# Altium PCB MAGI'sUSBASP-MinUSB.PcbDoc
Units mil, origin at the board's own origin, x right, y up, seen from the top; angles counter-clockwise.
Board outline 6000 x 4000 mil, 2 copper layers (Top Layer, Bottom Layer); 21 components, 22 nets, 103 pads, 26 vias.
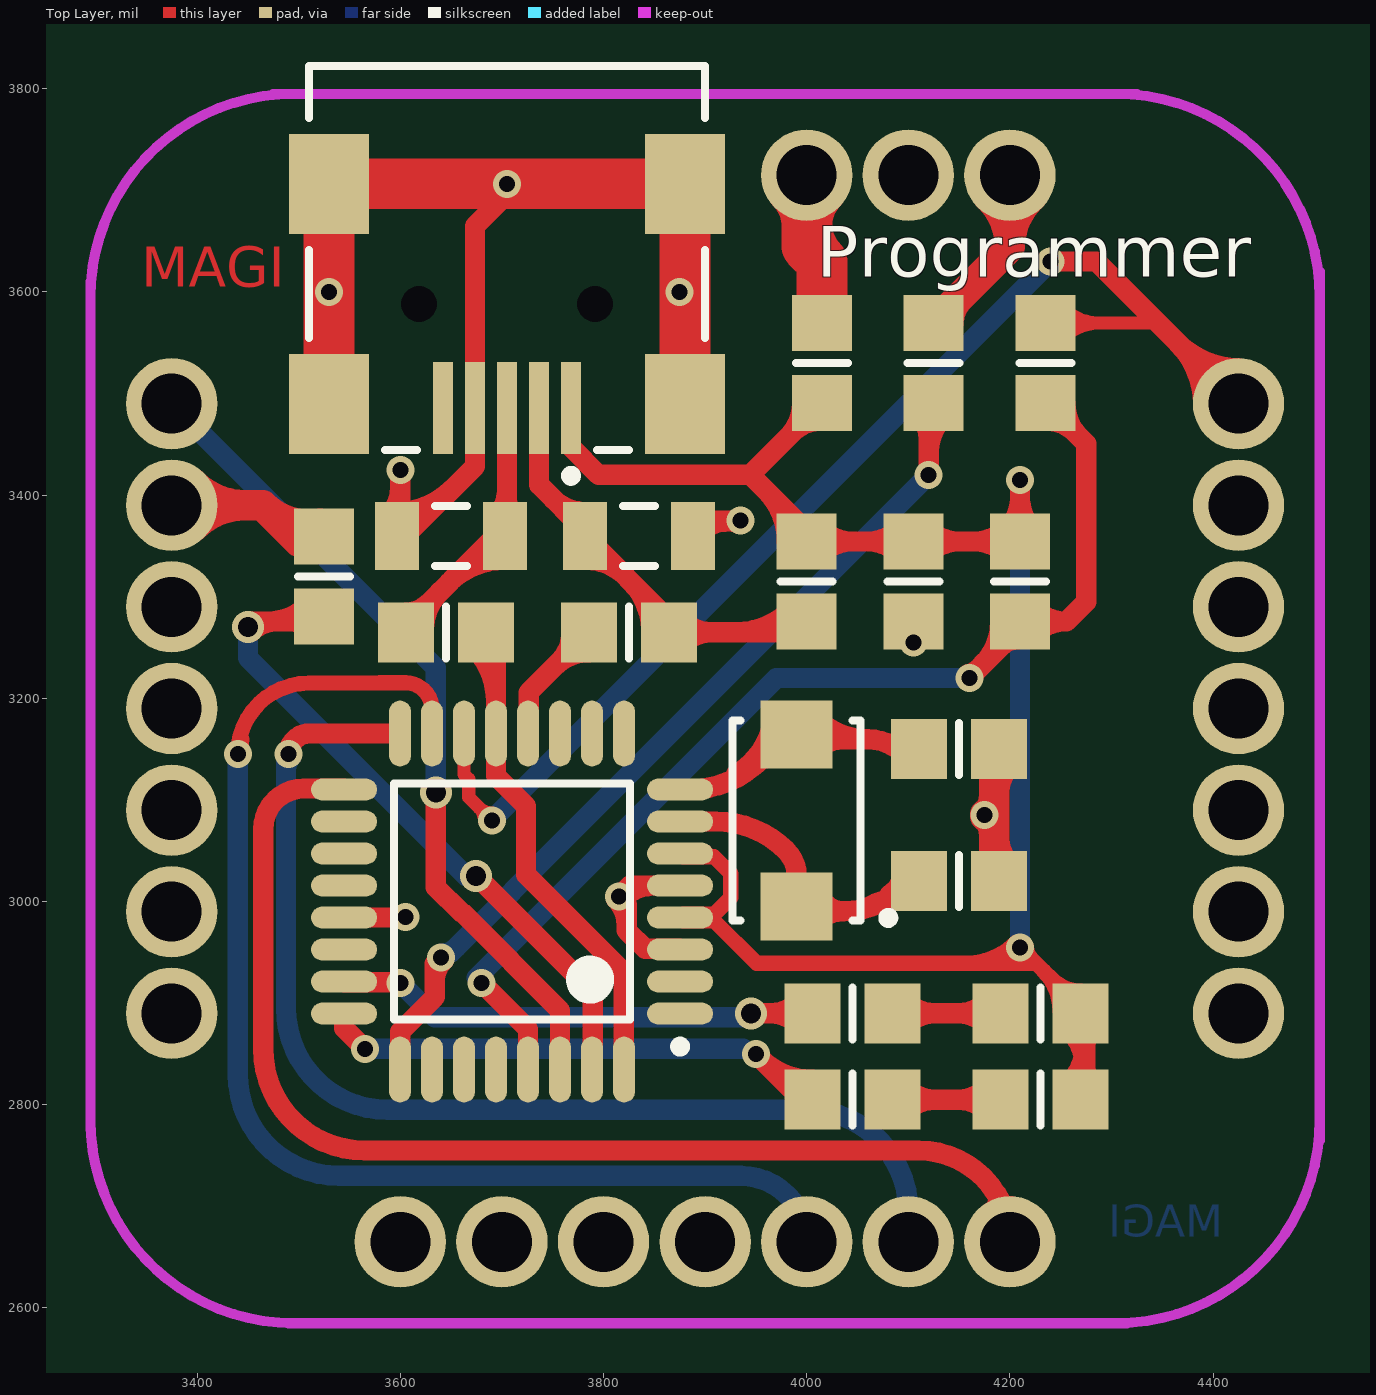
[diagram p0: Top Layer view]
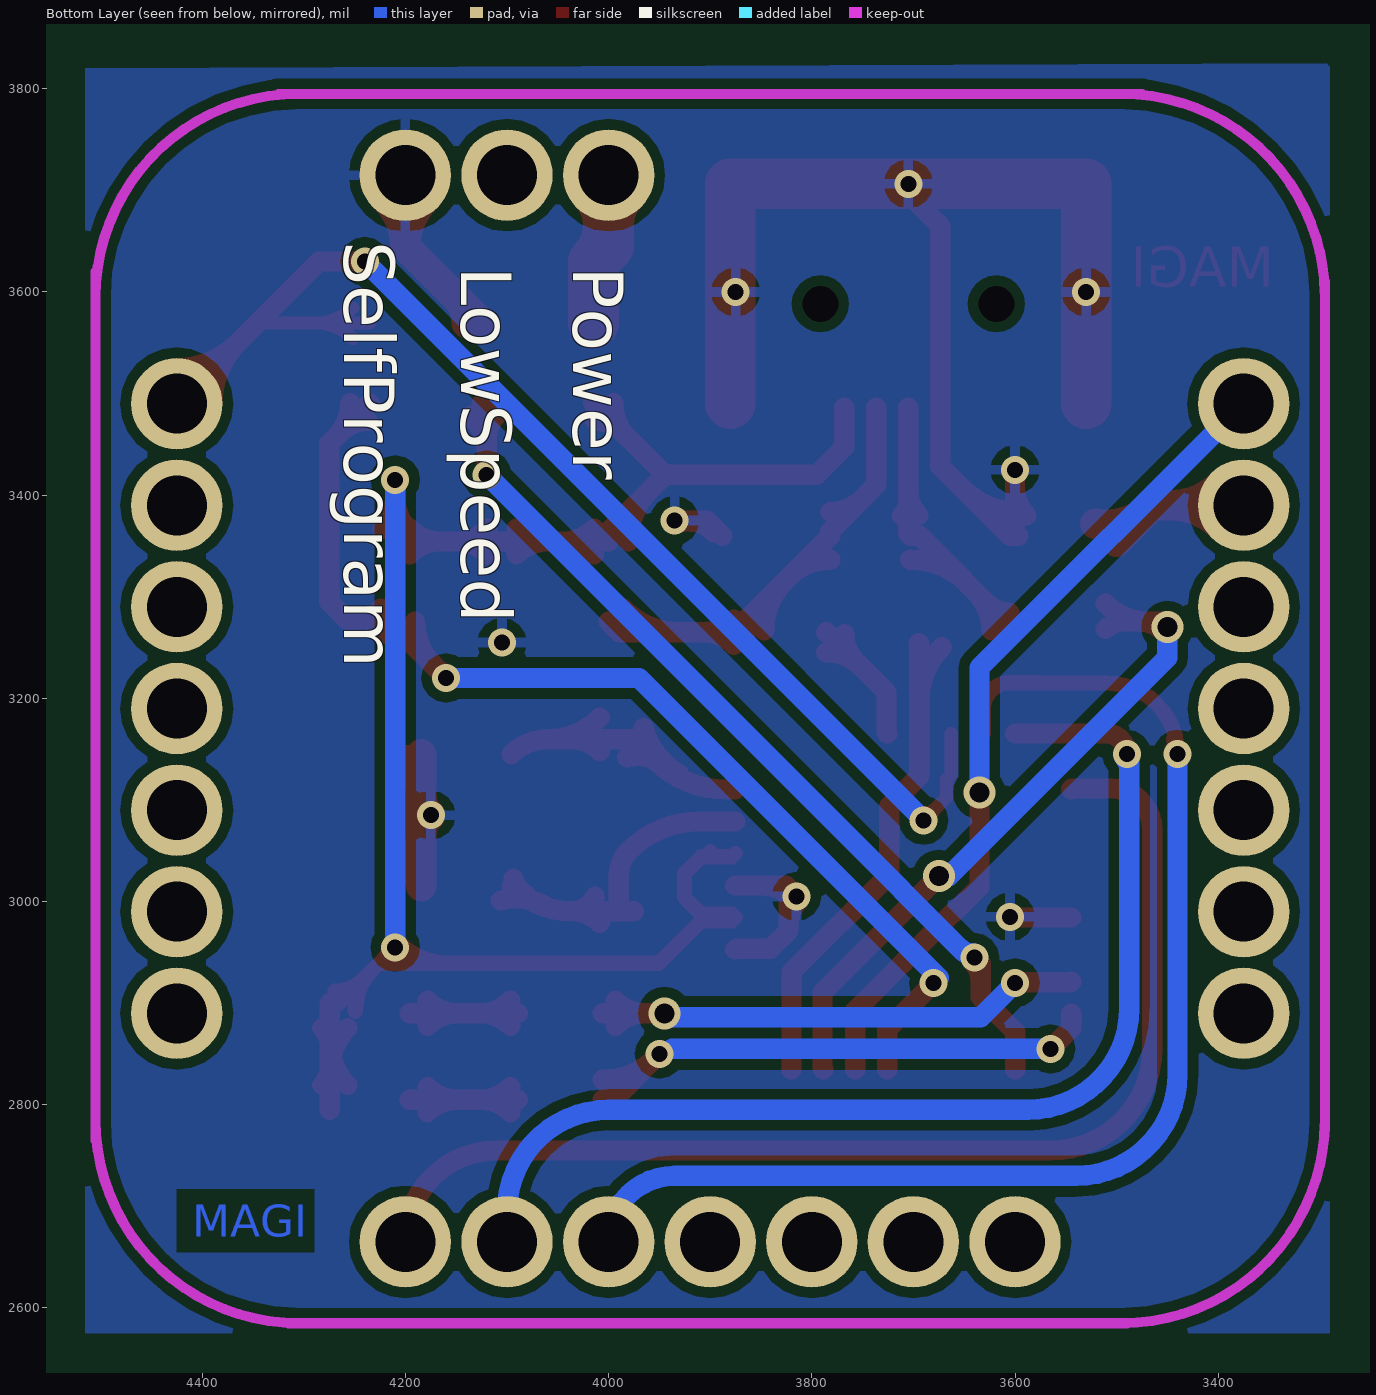
[diagram p1: Bottom Layer view, seen from below]

## Layer stack, top to bottom
Top Layer: signal copper 1.4
Dielectric: dielectric 12.6, FR-4, Dk 4.8
Bottom Layer: signal copper 1.4

## Board outline
1000,1000 7000,1000 7000,5000 1000,5000

## Design rules (kind name [scope] priority, off if disabled: settings)
Clearance [All] p1: gap=10
PolygonConnect [All] p1: connectstyle=Relief reliefconductorwidth=10 reliefentries=4 polygonreliefangle="90 Angle" airgapwidth=10
RoutingVias [All] p1: holewidth=28 width=50 viastyle="Through Hole" minholewidth=1 minwidth=1 maxholewidth=100 maxwidth=100
SolderMaskExpansion [All] p1: expansion=4
Width [All] p1: maxlimit=100 minlimit=10 preferedwidth=30
28 further rules are at their usual default settings.

## Components (designator, comment, footprint, x,y, rotation, side; value= is the part's Value field where it differs from the comment)
C1 "CAP_1" 6-0805_M 4150,3150 r180 top
C2 "CAP_1" 6-0805_M 4150,3020 r180 top
C3 "CAP_1" 6-0805_M 4105,3315 r90 top
J1 "CON2" 6-0805_M 4125,3530 r90 top
J2 "CON2" 6-0805_M 4235,3530 r270 top
J3 "MAGI-M8" MAGI-M8 3900,3190 r0 top
LED1 "LED_1" 6-0805_M 4230,2890 r180 top
LED2 "LED_1" 6-0805_M 4230,2805 r180 top
R0 "RES1" 6-0805_M 4015,3530 r270 top
R1 "RES1" 6-0805_M 4045,2890 r0 top
R2 "RES1" 6-0805_M 4045,2805 r0 top
R3 "RES1" 6-0805_M 4210,3315 r90 top
R4 "RES1" 6-0805_M 3525,3320 r90 top
R5 "RES1" 6-0805_M 3645,3265 r0 top
R6 "RES1" 6-0805_M 3825,3265 r180 top
R7 "RES1" 6-0805_M 4000,3315 r90 top
U1 "ATmega8A-AU" 32A_N 3710,3000 r180 top
U2 "USB" USB/SM0.8-6H5 3705,3795 r90 top
Y1 "CRYSTAL" 4SMX 3990,3080 r90 top
ZD1 "DIODE SCHOTTKY_1" C1206 3650,3360 r0 top
ZD2 "DIODE SCHOTTKY_1" C1206 3835,3360 r180 top

## Footprints (in the part's own frame and the unit in brackets; to place one, negate y for a bottom-side part, rotate by r counter-clockwise, add the part's x,y. Pads: shape width x height; smd on the part's side, far side on the other; paste and mask are expansions set on the pad)
4SMX [mm] "Quartz Crystal, SM; Body 5.2 x 3.4 mm (LxW max)"
  rect 1.7x1.8 smd: 1(-2.15,0) 2(2.15,0)
  silkscreen extent -2.57,-2.42 2.5,1.6
6-0805_M [mm] "Chip Resistor, Body 2.0x1.2mm, IPC Low Density"
  rect 1.4x1.5 smd: 1(-1,0) 2(1,0)
  silkscreen extent 0,-0.65 0,0.65, body extent -1.07,-0.7 1.07,0.7, height 0.7
32A_N [mm] "Thin QFP, 32-Leads, Body 7x7mm, Pitch 0.8mm, IPC Medium Density"
  oval 1.65x0.55 smd: 1(-4.2,2.8) 2(-4.2,2) 3(-4.2,1.2) 4(-4.2,0.4) 5(-4.2,-0.4) 6(-4.2,-1.2) 7(-4.2,-2) 8(-4.2,-2.8) 17(4.2,-2.8) 18(4.2,-2) 19(4.2,-1.2) 20(4.2,-0.4) 21(4.2,0.4) 22(4.2,1.2) 23(4.2,2) 24(4.2,2.8)
  oval 0.55x1.65 smd: 9(-2.8,-4.2) 10(-2,-4.2) 11(-1.2,-4.2) 12(-0.4,-4.2) 13(0.4,-4.2) 14(1.2,-4.2) 15(2,-4.2) 16(2.8,-4.2) 25(2.8,4.2) 26(2,4.2) 27(1.2,4.2) 28(0.4,4.2) 29(-0.4,4.2) 30(-1.2,4.2) 31(-2,4.2) 32(-2.8,4.2)
  silkscreen extent -4.33,-2.95 2.95,3.75, body extent -3.5,-3.5 3.5,3.5, height 1.2
C1206 [mm] "Chip Capacitor, Body 3.2x1.6mm, IPC High Density"
  rect 1.1x1.7 smd: 1(-1.35,0) 2(1.35,0)
  silkscreen extent -0.4,-0.75 0.4,0.75, body extent -1.7,-0.9 1.7,0.9, height 1.3
MAGI-M8 [mil]
  round 90 hole 59.06: 1(300,525) 2(200,525) 3(100,525) 8(-525,300) 9(-525,200) 10(-525,100) 11(-525,0) 12(-525,-100) 13(-525,-200) 14(-525,-300) 15(-300,-525) 16(-200,-525) 17(-100,-525) 18(0,-525) 19(100,-525) 20(200,-525) 21(300,-525) 22(525,-300) 23(525,-200) 24(525,-100) 25(525,0) 26(525,100) 27(525,200) 28(525,300)
  Keep-Out Layer lines w10: -605,-415 -605,290 -605,420 ; -605,-405 ccw(c-405,-405) -405,-605 ; -605,405 cw(c-405,405) -405,605 ; -425,605 425,605 ; -410,-605 415,-605 ; 405,-605 ccw(c405,-405) 605,-405 ; 405,605 cw(c405,405) 605,405 ; 605,-425 605,430
USB/SM0.8-6H5 [mm] "Connector; USB2.0, Type B, SM; 5 Position; Right Angle"
  rect 2.3x0.5 smd: 1(-7.85,-1.6) 2(-7.85,-0.8) 3(-7.85,0) 4(-7.85,0.8) 5(-7.85,1.6)
  rect 2.5x2 smd: 6(-7.75,4.45) 7(-2.25,4.45) 8(-7.75,-4.45) 9(-2.25,-4.45)
  round 0.6 hole 0.9 unplated: MH1(-5.25,2.2) MH2(-5.25,-2.2)
  silkscreen extent -9.67,-4.95 0.7,4.95, body extent -8.9,-4.95 0.7,4.95, height 3.9

## Part data
C1 C2 C3: "Capacitor"
J1 J2: "Connector"
U1: "8-bit AVR Microcontroller, 8KB Flash, 512 Bytes EEPROM, 1KB SRAM, 32-pin TQFP, Industrial Grade (-40癈 to 85癈)"
Y1: "Crystal"
ZD1 ZD2: "Schottky Diode"

## Via types
v1: diameter 27.56, hole 15.75, Top Layer to Bottom Layer, 22 vias
v2: diameter 31.5, hole 19.68, Top Layer to Bottom Layer, 4 vias

## Nets (pads, with @x,y where several pads share a name; then routed paths per layer and width w, separated by ;. In a path a pad name is that pad's centre, name@x,y a point inside that pad or via, vN(x,y) a via of type N, cw(c..) or ccw(c..) an arc to the next point about the centre after c; other vN are vias at no path point)
GND: C1.1 C2.1 C3.1 J1.2 J3.1 U1.3 U1.5 U1.21 U2.4 U2.6 U2.7 U2.8 U2.9 ZD1.1 ZD2.1 | length 2315.6
  Top Layer w20: U1.21 3599.25,2984.25 3600,2985 v1(3605,2985) ; ZD1.1@3588.61,3380.05 ccw(c3561.11,3407.55) 3600,3407.55 ; ZD1.1@3596.85,3383.46 ccw(c3596.85,3459.79) 3650.82,3405.82 ; v1(3600,3425) 3600,3363.15 ZD1.1 3605,3360 3673.51,3428.51 U2.4 3673.51,3664.92 v1@3715,3706.42 ; 3691.48,3682.89 ccw(c3667.95,3706.42) v1@3701.22,3706.42 ; v1@3812.33,3002.33 cw(c3786.87,2976.87) 3822.87,2976.87 ; v1@3817.67,3002.33 cw(c3850.07,2969.93) U1.5@3850.07,3015.75 ; U1.3 3874.68,2953.43 3840.93,2953.43 3822.87,2971.48 3822.87,2997.13 v1(3815,3005) 3825.75,3015.75 U1.5 ; ZD2.1 3903.15,3375 v1(3935,3375) ; ZD2.1@3896.39,3363.57 cw(c3923.98,3335.98) v1@3923.98,3375 ; 3918.8,3373.61 cw(c3923.68,3355.39) v1@3933.11,3371.73
  Top Layer w30: J1.2 4200,3644.37 ; J1.2@4139.53,3569.37 cw(c4174.6,3569.37) J1.2@4149.8,3594.17 ; v1@4175.86,3084.14 ccw(c4155.33,3104.67) 4184.37,3104.67 ; v1@4175.86,3085.86 cw(c4155.33,3065.33) 4184.37,3065.33 ; J3.1@4179.17,3693.41 cw(c4131.87,3644.37) 4200,3644.37 ; C2.1@4184.37,3015 C1.1@4184.37,3145 ; 4184.37,3064.36 ccw(c4231.76,3064.36) C2.1@4198.25,3030.85 ; 4184.37,3105.64 cw(c4231.76,3105.64) C1.1@4198.25,3139.15 ; J3.1 4200,3644.37 ; J3.1@4220.83,3693.41 ccw(c4268.13,3644.37) 4200,3644.37
  Top Layer w50: U2.6 U2.7 3715,3706.42 U2.9 U2.8
  other v1: 4175,3085 4105,3255 3530,3600 3875,3600 3705,3706.42
MISO: J3.20 U1.16 | length 1136.4
  Top Layer w20: v1(3490,3145) cw(c3510.35,3145) 3510.35,3165.35 U1.16
  Bottom Layer w20: 3487.5,3129.84 cw(c3505.16,3129.84) v1@3492.67,3142.33 ; v1@3487.5,3139.44 3487.5,2895 ccw(c3587.5,2895) 3587.5,2795 4000,2795 cw(c4000,2695) 4100,2695 J3.20
MOSI: J3.19 U1.15 | length 1277.9
  Top Layer w15: v1@3436.86,3150.44 ccw(c3429.28,3163.57) 3443.92,3159.64 ccw(c3458.57,3155.72) v1@3445.44,3148.14 ; v1(3440,3145) cw(c3510,3145) 3510,3215 3595,3215 ; 3580,3215.33 3605,3215.33 cw(c3605,3189.07) 3631.26,3189.07 U1.15
  Bottom Layer w20: v1(3440,3145) 3440,2830 ccw(c3540,2830) 3540,2730 3935,2730 cw(c3935,2665) J3.19
NetC1_2: C1.2 U1.8 Y1.2 | length 389.4
  Top Layer w20: U1.8 3884.17,3110.24 ccw(c3884.17,3210.24) Y1.2@3954.88,3139.53 ; 3930.73,3125.58 ccw(c3893.57,3189.96) Y1.2@3965.37,3170.72 ; 3952.39,3138.09 cw(c3971.87,3104.34) Y1.2@3981.96,3141.98 ; Y1.2@3975,3159.65 4060.27,3159.65 ; Y1.2@4008.56,3148.05 cw(c4036.55,3120.07) 4036.55,3159.65 ; Y1.2@4008.63,3181.17 ccw(c4060.27,3232.35) 4060.27,3159.65 ; C1.2@4095.63,3145 ccw(c4060.27,3109.64) 4060.27,3159.65
NetC2_2: C2.2 U1.7 Y1.1 | length 422.7
  Top Layer w20: U1.7 3910.62,3078.74 cw(c3910.62,2980.62) 3980,3050 cw(c3955.86,3025.86) 3990,3025.86 Y1.1 ; Y1.1@3975,2990.35 4036.13,2990.35 ; Y1.1@4008.67,2978.87 cw(c4036.13,2951.78) 4036.13,2990.35 ; Y1.1@4013.34,3005.04 ccw(c4036.13,3015.38) 4036.13,2990.35 ; 4061.29,2995.17 cw(c4090.81,2944.05) C2.2@4106.09,3001.07 ; 4081.67,3006.94 ccw(c4068.8,3029.24) C2.2@4093.67,3022.58 ; C2.2@4095.63,3015 cw(c4036.13,3074.5) 4036.13,2990.35
NetJ1_1: J1.1 U1.25 | length 964.8
  Top Layer w20: U1.25 3599.76,2871.99 3633.78,2906.01 3633.78,2938.78 v1@3635,2940 ; 3633.78,2920.86 cw(c3664.14,2920.86) v1@3642.67,2942.33 ; J1.1@4110.62,3478.21 cw(c4087.96,3455.56) 4120,3455.56 ; v1(4120,3420) 4120,3485.63 J1.1 ; 4120,3440.92 cw(c4172.74,3440.92) J1.1@4135.45,3478.21
  Bottom Layer w20: v1@3640,2948.78 ccw(c3640,2970.65) 3655.46,2955.18 ; v1@3650.28,2950 3710.47,3010.19 3710.47,3010.47 v1(4120,3420)
  other v1: 3640,2945
NetJ2_2: J2.2 R3.1 U1.29 | length 1308.8
  Top Layer w20: v1(3680,2920) 3725.75,2874.25 U1.29 ; v1@4159.02,3223.65 ccw(c4152.56,3247.78) 4174.19,3235.29 ; v1@4159.06,3223.66 ccw(c4153.07,3247.1) 4174.02,3235 ; v1(4160,3220) 4210,3270 R3.1 4255.63,3275.63 4275,3295 4275,3450.63 J2.2 ; 4172.68,3232.68 ccw(c4129.74,3275.63) R3.1@4190.47,3275.63 ; R3.1@4191.03,3251.03 cw(c4208.03,3234.02) R3.1@4208.03,3258.07 ; R3.1@4224.38,3263.21 cw(c4254.36,3233.24) 4254.36,3275.63 cw(c4254.36,3318.02) R3.1@4224.38,3288.05 ; J2.2@4236.97,3473.07 cw(c4236.97,3435.43) 4263.58,3462.05 ; J2.2@4254.53,3490.63 ccw(c4301.67,3490.63) 4268.34,3457.29
  Bottom Layer w20: v1(3680,2920) 3675,2925 3970,3220 v1@4150,3220
NetJ3_3: J3.3 R0.1 | length 306.5
  Top Layer w50: J3.3@3985.86,3700.86 cw(c3951.72,3666.72) 4000,3666.72 cw(c4048.28,3666.72) J3.3@4014.14,3700.86 ; J3.3 4000,3645 4015,3630 ; J3.3@4014.38,3701.1 ccw(c4050.86,3665.87) 4015,3630 ; R0.1 4015,3630
NetLED1_2: LED1.2 R1.2 | length 239.4
  Top Layer w20: R1.2@4089.37,2890 LED1.2@4195.63,2890 ; R1.2@4096.79,2877.58 cw(c4126.76,2847.61) 4126.76,2890 cw(c4126.76,2932.39) R1.2@4096.79,2902.42 ; LED1.2@4178.21,2877.58 ccw(c4148.24,2847.61) 4148.24,2890 ccw(c4148.24,2932.39) LED1.2@4178.21,2902.42
NetLED2_2: LED2.2 R2.2 | length 239.4
  Top Layer w20: R2.2@4089.37,2805 LED2.2@4195.63,2805 ; R2.2@4096.79,2792.58 cw(c4126.76,2762.61) 4126.76,2805 cw(c4126.76,2847.39) R2.2@4096.79,2817.42 ; LED2.2@4178.21,2792.58 ccw(c4148.24,2762.61) 4148.24,2805 ccw(c4148.24,2847.39) LED2.2@4178.21,2817.42
NetR1_1: R1.1 U1.23 | length 543.7
  Top Layer w20: U1.23 3545.32,2920.59 3599.41,2920.59 v1(3600,2920) ; v2(3945,2890) R1.1 ; R1.1@3993.21,2877.58 ccw(c3963.24,2847.61) 3963.24,2890 ccw(c3963.24,2932.39) R1.1@3993.21,2902.42
  Bottom Layer w20: v1(3600,2920) 3633.78,2886.22 3941.22,2886.22 v2(3945,2890)
NetR2_1: R2.1 U1.24 | length 547.1
  Top Layer w20: U1.24 3544.65,2875.35 v1(3565,2855) ; v1(3950,2850) 3995,2805 R2.1 ; v1@3954.15,2845.85 ccw(c4005.63,2897.33) R2.1@4005.63,2824.53
  Bottom Layer w20: v1(3565,2855) v1@3937.5,2855
NetR4_1: R4.1 U1.31 | length 727.9
  Top Layer w20: v2(3450,3270) cw(c3455.63,3270) 3455.63,3275.63 R4.1@3500,3275.63 ; v2@3454.06,3265.94 cw(c3477.47,3242.53) 3477.47,3275.63 ; 3468.57,3275.63 ccw(c3468.57,3335.09) R4.1@3510.62,3293.05 ; 3492.71,3275.63 cw(c3492.71,3250.31) R4.1@3510.62,3268.21 ; v2(3674.72,3025) 3675,3025 3789.41,2910.59 3789.41,2835.32 U1.31
  Bottom Layer w20: v2(3450,3270) 3450,3240 3665,3025 v2(3674.72,3025)
NetR5_1: R5.1 U2.3 ZD1.2 | length 440.1
  Top Layer w20: R5.1 3605.63,3271.63 3694,3360 ZD1.2 3705,3361.85 U2.3 ; R5.1@3605.63,3284.53 ccw(c3605.63,3315.66) R5.1@3627.65,3293.65 ; R5.1@3623.19,3266.97 cw(c3676.84,3266.97) 3638.9,3304.9 ; 3647.47,3313.47 cw(c3703.15,3257.8) ZD1.2@3703.15,3336.54 ; ZD1.2@3694.91,3380.05 ccw(c3670.54,3404.42) 3705,3404.42 ; 3705,3395.47 ccw(c3726.81,3395.47) ZD1.2@3711.39,3380.05
NetR6_1: R6.1 R7.1 U2.2 ZD2.2 | length 675.6
  Top Layer w20: U2.2 3736.5,3410.05 3781.85,3364.7 ZD2.2 3864.37,3277.48 R6.1 3989.37,3265 R7.1 ; 3749.82,3396.73 ccw(c3781.85,3428.76) ZD2.2@3781.85,3383.46 ; ZD2.2@3781.85,3336.54 cw(c3781.85,3279.89) 3821.91,3319.94 ; 3826.96,3314.89 cw(c3779.04,3266.97) R6.1@3846.81,3266.97 ; R6.1@3876.79,3252.58 cw(c3906.76,3222.61) 3906.76,3265 cw(c3906.76,3307.39) R6.1@3876.79,3277.42 ; 3929.98,3265 ccw(c3929.98,3343.68) R7.1@3985.62,3288.05
PB0: R6.2 U1.12 | length 191
  Top Layer w20: U1.12 3726.42,3166.02 3726.42,3205.79 R6.2 ; 3752.29,3231.66 cw(c3785.63,3198.33) R6.2@3785.63,3245.47 ; 3757.05,3236.42 ccw(c3730.43,3263.03) R6.2@3768.07,3263.03
PB1: R5.2 U1.13 U1.32 | length 532
  Top Layer w20: R5.2@3671.95,3250.62 cw(c3618.12,3196.78) U1.13@3694.25,3196.78 ; R5.2@3695,3254.37 3694.25,3253.62 U1.13 3694.25,3123.52 3723.78,3093.99 3723.78,3026.5 3820,2930.28 3820,2834.88 U1.32
RST: J2.1 J3.28 U1.14 | length 1467.9
  Top Layer w13: U1.14 3662.76,3124.98 3667.25,3120.48 3667.25,3102.75 v1(3690,3080) ; v1@3682.72,3080 ccw(c3665.15,3080) 3677.57,3092.43 ccw(c3690,3104.85) v1@3690,3087.28 ; J2.1 4344.37,3569.37 4345,3570 ; J2.1@4251.86,3554.48 cw(c4287.81,3518.53) 4287.81,3569.37 cw(c4287.81,3620.21) J2.1@4251.86,3584.26
  Top Layer w20: v1(4240,3630) 4285,3630 4345,3570 J3.28 ; J3.28@4390,3490 ccw(c4305.5,3490) 4365.25,3549.75 ccw(c4425,3609.5) J3.28@4425,3525
  Bottom Layer w20: v1(3690,3080) v1(4240,3630)
RXD: J3.8 U1.30 | length 806
  Top Layer w20: v2(3635,3107.13) 3635,3014.17 3659.91,2989.25 3660.75,2989.25 3757.24,2892.76 U1.30
  Bottom Layer w20: J3.8 3635,3230 v2@3635,3115.28
SCK: J3.21 U1.17 | length 1197.5
  Top Layer w20: U1.17 ccw(c3543.66,3110.24) 3543.66,3111.22 3505,3111.22 ccw(c3505,3071.22) 3465,3071.22 3465,2855 ccw(c3565,2855) 3565,2755 4110,2755 cw(c4110,2665) J3.21 ; J3.21@4181.89,2694.95 ccw(c4174.9,2706.5) 4187.94,2710 ccw(c4200.99,2713.49) J3.21@4200.71,2699.99
TXD: J3.9 R4.2 | length 315.3
  Top Layer w30: J3.9 3464.37,3390 ; J3.9@3396.21,3368.79 cw(c3447.43,3317.57) 3447.43,3390 cw(c3447.43,3462.43) J3.9@3396.21,3411.21 ; R4.2@3500,3354.37 3464.37,3390 ; R4.2@3521,3371.76 cw(c3510.46,3436.09) 3464.37,3390
VCC: C3.2 LED1.1 LED2.1 R0.2 R3.2 R7.2 U1.4 U1.6 U2.1 | length 2670.4
  Top Layer w15: U1.6 3878.52,3044.07 3908.74,3044.07 ; U1.4@3899.83,2982.49 cw(c3908.74,2976.9) 3908.74,2987.42 ; U1.4@3899.83,2986.02 ccw(c3908.74,2991.6) 3908.74,2981.08 ; U1.6@3899.83,3049.01 ccw(c3908.74,3054.59) 3908.74,3044.07 ; 4157.15,2939.39 ccw(c4157.15,3007.85) v1@4205.56,2959.44 ; 4193.37,2939.39 ccw(c4193.37,2971.63) v1@4216.17,2948.83 ; v1@4210,2948.72 cw(c4210,2933.56) 4220.72,2944.28 cw(c4231.44,2955) v1@4216.28,2955 ; v1(4210,2955) 4265,2900 LED1.1@4274.37,2900 ; 4225,2939.39 3950.43,2939.39 3908.74,2981.08 ; 4232.54,2932.46 cw(c4192.04,2891.97) LED1.1@4249.31,2891.97 ; 4241.38,2923.62 ccw(c4269.37,2951.61) LED1.1@4269.37,2912.03 ; 3908.74,2981.08 3878.52,2981.08 U1.4 3878.52,2987.42 3908.74,2987.42 ; 3908.74,2987.42 3925.33,3004.01 3925.33,3027.48 3908.74,3044.07
  Top Layer w20: U2.1 3767.99,3447.01 3795,3420 3944.37,3420 ; 3959.59,3404.78 cw(c3909.19,3354.37) R7.2@3980.47,3354.37 ; 3981.66,3457.29 ccw(c3948.33,3490.63) R0.2@3995.47,3490.63 ; 3986.42,3462.05 cw(c4013.03,3435.43) R0.2@4013.03,3473.07 ; R7.2@4014.38,3341.95 cw(c4044.36,3311.98) 4044.36,3354.37 cw(c4044.36,3396.76) R7.2@4014.38,3366.79 ; R0.2 3944.37,3420 ; C3.2@4090.62,3341.95 ccw(c4060.64,3311.98) 4060.64,3354.37 ccw(c4060.64,3396.76) C3.2@4090.62,3366.79 ; C3.2@4119.38,3341.95 cw(c4149.36,3311.98) 4149.36,3354.37 cw(c4149.36,3396.76) C3.2@4119.38,3366.79 ; R3.2@4195.62,3341.95 ccw(c4165.64,3311.98) 4165.64,3354.37 ccw(c4165.64,3396.76) R3.2@4195.62,3366.79 ; R3.2@4197.58,3366.79 ccw(c4167.61,3396.76) 4210,3396.76 ccw(c4252.39,3396.76) R3.2@4222.42,3366.79 ; v1(4210,3415) R3.2 C3.2 R7.2 4000,3364.37 3944.37,3420 ; LED2.1@4256.95,2819.38 ccw(c4214.91,2861.43) LED1.1@4274.37,2861.43 ; LED1.1@4256.95,2875.62 cw(c4214.91,2833.57) LED2.1@4274.37,2833.57 ; LED1.1@4261.95,2872.12 cw(c4254.4,2855.92) 4271.66,2851.3 ; LED2.1@4274.37,2795 LED1.1@4274.37,2900 ; 4274.37,2837.29 ccw(c4299.69,2837.29) LED2.1@4281.79,2819.38 ; 4274.37,2857.71 cw(c4299.69,2857.71) LED1.1@4281.79,2875.62
  Bottom Layer w20: v1(4210,2955) v1(4210,3415)
pads on no net: J3.2 J3.10 J3.11 J3.12 J3.13 J3.14 J3.15 J3.16 J3.17 J3.18 J3.22 J3.23 J3.24 J3.25 J3.26 J3.27 U1.1 U1.2 U1.9 U1.10 U1.11 U1.18 U1.19 U1.20 U1.22 U1.26 U1.27 U1.28 U2.5 U2.MH1 U2.MH2

## Polygon pours and split planes (outlines as drawn)
GND on Bottom Layer "Keep-Out Layer-No Net" (solid, pour order 4): 3290,3825 3290,2575 4515,2575 4515,3820

## Other copper
Top Layer:
  text "MAGI" at 3345,3605 h39.37
Bottom Layer:
  text "MAGI" at 4410,2670 h31.5

## Silkscreen, mask and mechanical layers (free items; w line width, h text height)
Top Overlay:
  text "Programmer" at 4010,3615 h50
Bottom Overlay:
  text "SelfProgram" at 4260,3650 h50 r90
  text "Power" at 4035,3625 h50 r90
  text "LowSpeed" at 4145,3625 h50 r90

## Text inside footprints (layer, text, board x,y; h text height)
U2: Mechanical 1 "PCB Edge" at 3863.91,3812.02 h9.84 r180